# Altium PCB park-contor-12i.PcbDoc
Units mm, origin at the board's own origin, x right, y up, seen from the top; angles counter-clockwise.
Board outline 150 x 220.09 mm, 2 copper layers (Top Layer, Bottom Layer); 79 components, 105 nets, 463 pads, 2 vias.
Unrouted connection lines stored in the file: 143.
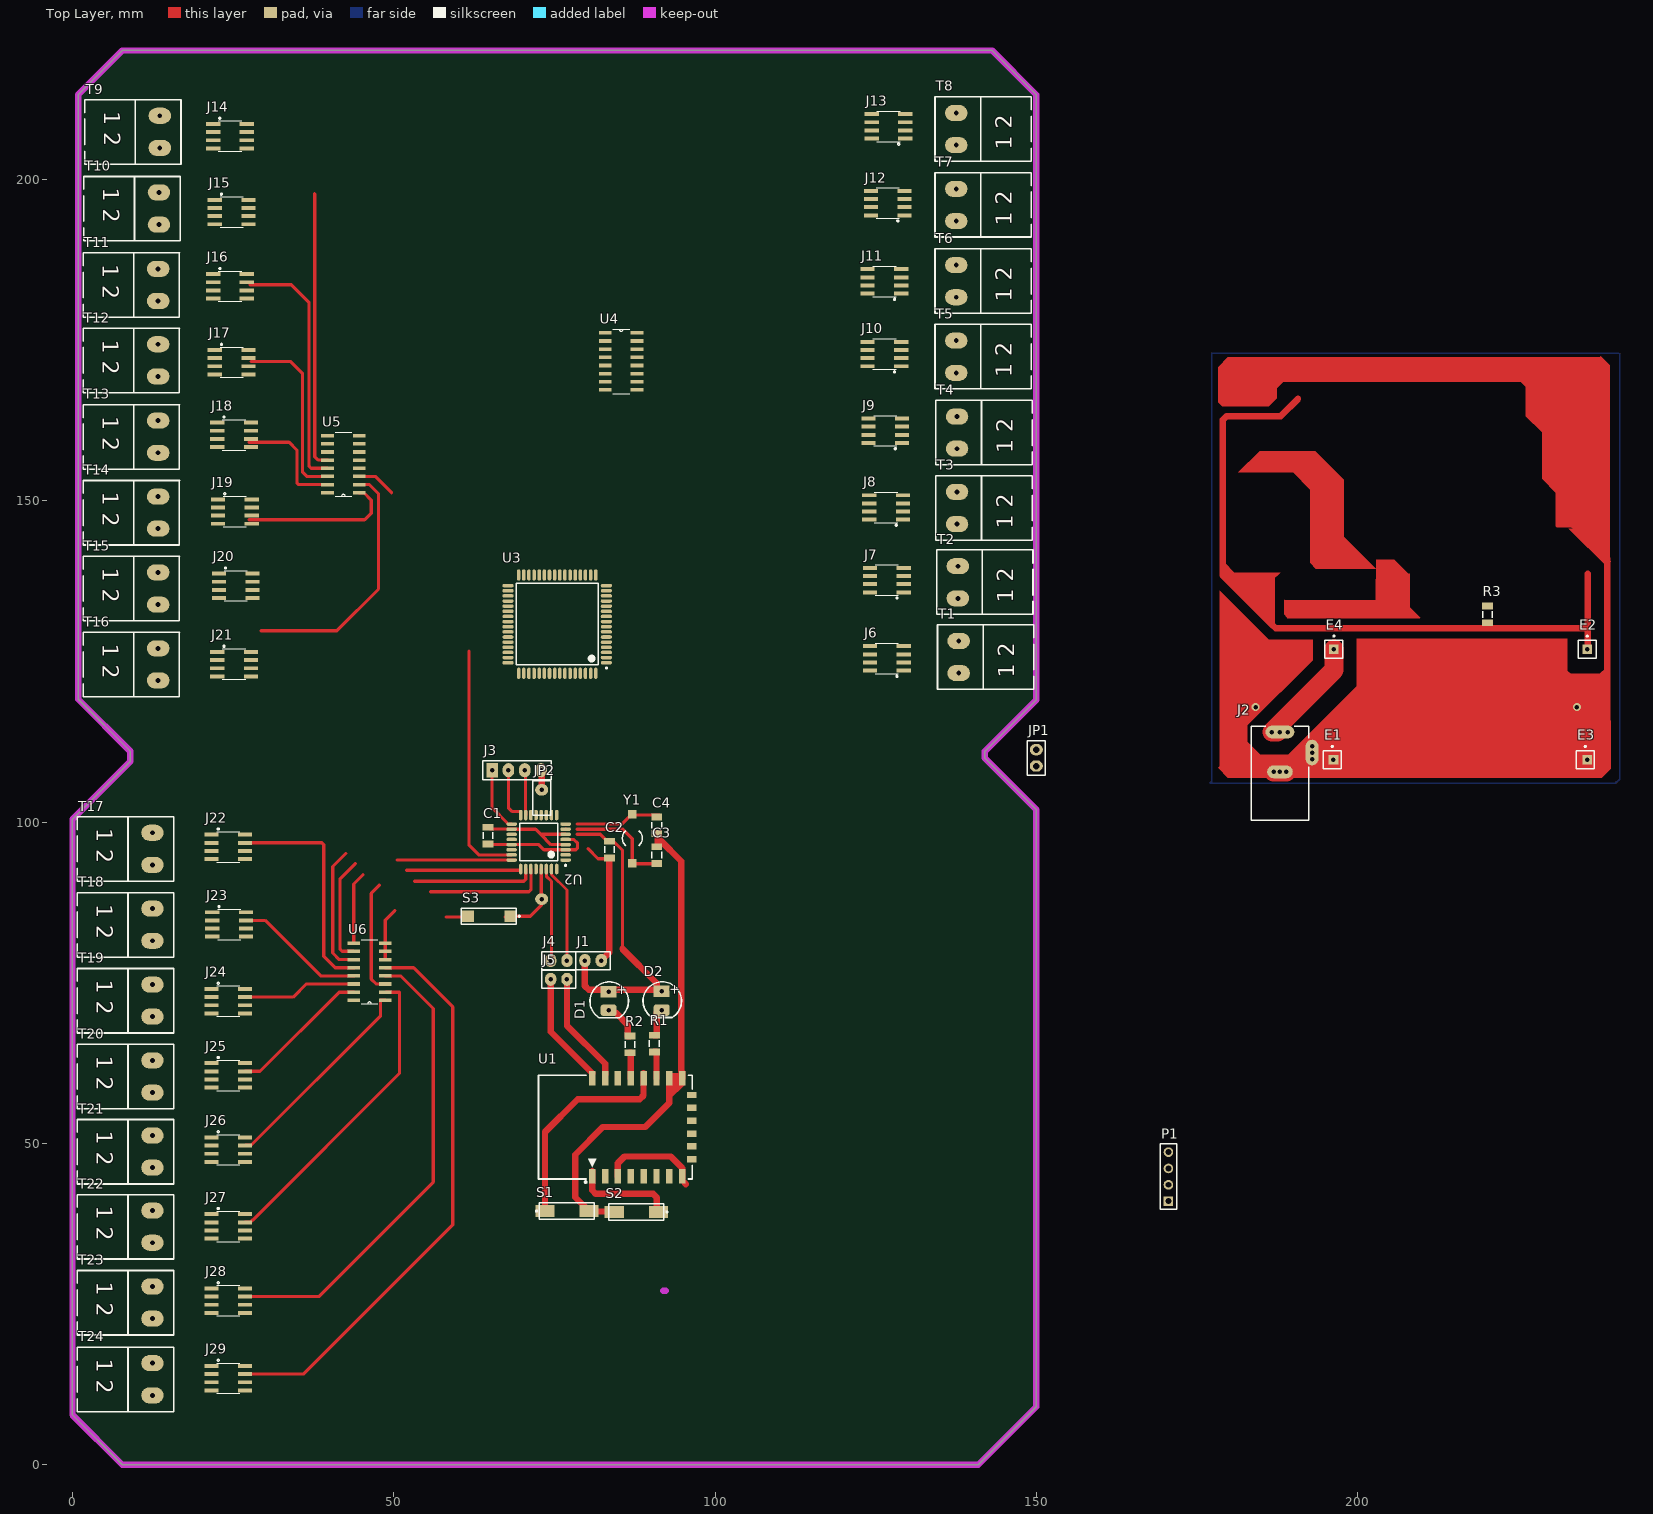
[diagram p0: Top Layer view]
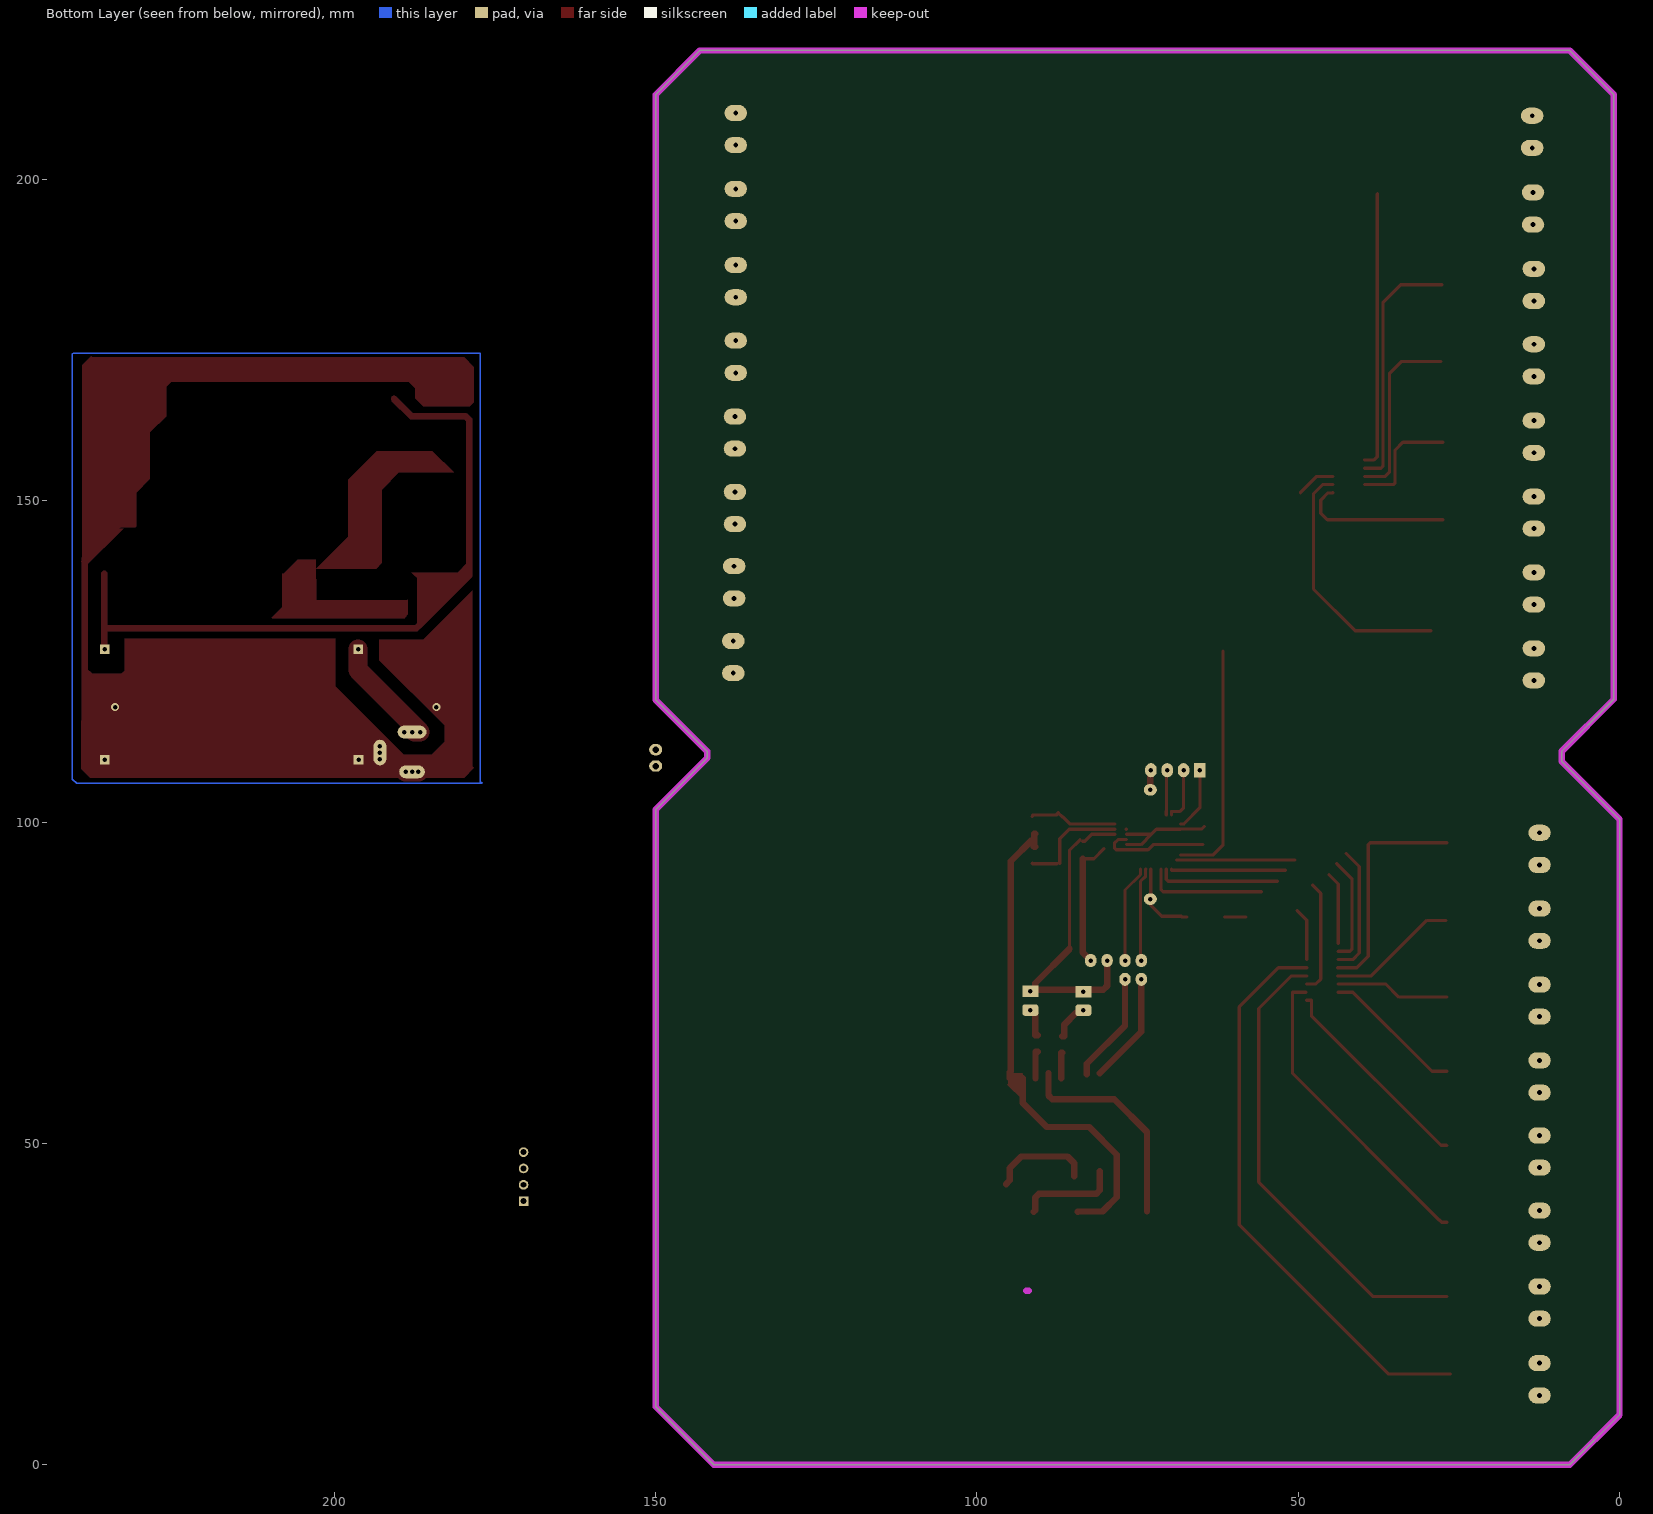
[diagram p1: Bottom Layer view, seen from below]

## Layer stack, top to bottom
Top Solder: solder mask 0.0102, Solder Resist, Dk 3.5
Top Layer: signal copper 0.0356
Dielectric 1: dielectric 0.32, FR-4, Dk 4.8
Bottom Layer: signal copper 0.0356
Bottom Solder: solder mask 0.0102, Solder Resist, Dk 3.5

## Board outline
0,7.747 7.747,0 140.97,0 150,9.03 150,101.968 141.986,109.982 141.986,110.998 150,119.012 150,213.22 143.129,220.091 7.747,220.091 0.889,213.233 0.889,119.126 9.017,110.998 9.017,109.474 0,100.457

## Design rules (kind name [scope] priority, off if disabled: settings)
Clearance Clearance_1 [InPolygon] p1: gap=0.8 ignorepadtopadclearanceinfootprint=FALSE
Clearance [All] p2: gap=0.254 ignorepadtopadclearanceinfootprint=FALSE except(0: Arc-Hole Track-Hole SMDPad-Hole THPad-Hole Via-Hole Fill-Hole Poly-Hole Region-Hole Text-Hole)
DiffPairsRouting [All] p1: maxlimit=0.254 minlimit=0.8 mostfreqgap=0.254 toplayer_minwidth=0.381 toplayer_maxwidth=0.381 toplayer_prefwidth=0.381 bottomlayer_minwidth=0.381 bottomlayer_maxwidth=0.381 bottomlayer_prefwidth=0.381 maxuncoupledlength=12.7
PolygonConnect [All] p1: connectstyle=Relief reliefconductorwidth=0.254 reliefentries=4 polygonreliefangle="90 Angle" airgapwidth=0.254
RoomDefinition park-contor-12i [InComponentClass('park-contor-12i')] p1: confinementstyle=ConfineIn formatcopy=TRUE lockcomponents=FALSE outline 151.638,0.762 536.575,0.762 536.575,58.547 151.638,58.547
RoutingLayers [All] p1: top layer_v5=FALSE bottom layer_v5=TRUE
RoutingVias [All] p1: holewidth=0.711 width=2.5 viastyle="Through Hole" minholewidth=0.711 minwidth=1.27 maxholewidth=0.711 maxwidth=2
SolderMaskExpansion [All] p1: expansion=0.102 istentingtop=FALSE
Width [All] p1: maxlimit=3 minlimit=0.5 preferedwidth=1
28 further rules are at their usual default settings.

## Components (designator, comment, footprint, x,y, rotation, side; value= is the part's Value field where it differs from the comment)
C1 "=Value" "CAP 1206" 64.643,97.917 r270 top
C2 "=Value" "CAP 1206" 83.566,95.758 r270 top
C3 "=Value" "CAP 1206" 90.932,94.842 r90 top
C4 "=Value" "CAP 1206" 90.932,99.541 r270 top
D1 "LED 5mm" LED-1 83.439,72.236 r0 top
D2 "LED 5mm" LED-1 91.694,72.263 r0 top
E1 "Antenna" PIN1#1 196.061,109.728 r0 top
E2 "Antenna" PIN1#2 235.747,126.894 r0 top
E3 "Antenna" PIN1#3 235.431,109.728 r0 top
E4 "Antenna" PIN1#2 196.315,126.894 r0 top
J1 "Header2X1" "Header 2X1"#1 81.026,78.459 r0 top
J2 "PWR2.5" KLD-0202 187.917,100.323 r90 top
J3 "Header4X1" "HEADER 4X1" 65.305,108.077 r0 top
J4 "Header2X1" "Header 2X1"#1 75.692,78.459 r180 top
J5 "Header2X1" "Header 2X1"#1 75.692,75.538 r0 top
J6 "ACS712" SO08 126.746,125.476 r90 top
J7 "ACS712" SO08 126.746,137.668 r90 top
J8 "ACS712" SO08 126.619,148.971 r90 top
J9 "ACS712" SO08 126.492,160.909 r90 top
J10 "ACS712" SO08 126.365,172.847 r90 top
J11 "ACS712" SO08 126.365,184.15 r90 top
J12 "ACS712" SO08 126.873,196.342 r90 top
J13 "ACS712" SO08 127,208.28 r90 top
J14 "ACS712" SO08 24.511,206.756 r270 top
J15 "ACS712" SO08 24.765,194.945 r270 top
J16 "ACS712" SO08 24.511,183.388 r270 top
J17 "ACS712" SO08 24.765,171.577 r270 top
J18 "ACS712" SO08 25.146,160.274 r270 top
J19 "ACS712" SO08 25.273,148.336 r270 top
J20 "ACS712" SO08 25.4,136.779 r270 top
J21 "ACS712" SO08 25.146,124.587 r270 top
J22 "ACS712" SO08 24.257,96.139 r270 top
J23 "ACS712" SO08 24.384,84.074 r270 top
J24 "ACS712" SO08 24.257,72.136 r270 top
J25 "ACS712" SO08 24.257,60.579 r270 top
J26 "ACS712" SO08 24.257,49.022 r270 top
J27 "ACS712" SO08 24.257,37.084 r270 top
J28 "ACS712" SO08 24.257,25.527 r270 top
J29 "ACS712" SO08 24.257,13.462 r270 top
JP1 "Jumper" "Header 2X1"#2 150,110 r90 top
JP2 "Jumper" "Header 2X1"#3 73.025,103.759 r270 top
P1 "Header 4" HDR1X4 170.561,41.021 r90 top
R1 "10K" "RES 1206 (3216X08L)" 90.551,65.532 r90 top
R2 "10K" "RES 1206 (3216X08L)" 86.741,65.409 r90 top
R3 "10K" "RES 1206 (3216X08L)" 220.191,132.334 r270 top
S1 "SW-PB" SPST-2#1 76.962,39.47 r0 top
S2 "SW-PB" SPST-2#1 87.757,39.343 r180 top
S3 "SW-PB" SPST-2#2 64.77,85.344 r180 top
T1 "Phoenix terminal" "phoenix terminal 2" 149.606,120.697 r90 top
T2 "Phoenix terminal" "phoenix terminal 2" 149.479,132.334 r90 top
T3 "Phoenix terminal" "phoenix terminal 2" 149.352,143.891 r90 top
T4 "Phoenix terminal" "phoenix terminal 2" 149.352,155.622 r90 top
T5 "Phoenix terminal" "phoenix terminal 2" 149.225,167.433 r90 top
T6 "Phoenix terminal" "phoenix terminal 2" 149.225,179.197 r90 top
T7 "Phoenix terminal" "phoenix terminal 2" 149.225,191.055 r90 top
T8 "Phoenix terminal" "phoenix terminal 2" 149.225,202.866 r90 top
T9 "Phoenix terminal" "phoenix terminal 2" 1.905,212.424 r270 top
T10 "Phoenix terminal" "phoenix terminal 2" 1.778,200.486 r270 top
T11 "Phoenix terminal" "phoenix terminal 2" 1.651,188.595 r270 top
T12 "Phoenix terminal" "phoenix terminal 2" 1.651,176.864 r270 top
T13 "Phoenix terminal" "phoenix terminal 2" 1.651,164.973 r270 top
T14 "Phoenix terminal" "phoenix terminal 2" 1.651,153.162 r270 top
T15 "Phoenix terminal" "phoenix terminal 2" 1.651,141.351 r270 top
T16 "Phoenix terminal" "phoenix terminal 2" 1.651,129.54 r270 top
T17 "Phoenix terminal" "phoenix terminal 2" 0.762,100.838 r270 top
T18 "Phoenix terminal" "phoenix terminal 2" 0.762,89.027 r270 top
T19 "Phoenix terminal" "phoenix terminal 2" 0.762,77.216 r270 top
T20 "Phoenix terminal" "phoenix terminal 2" 0.762,65.405 r270 top
T21 "Phoenix terminal" "phoenix terminal 2" 0.762,53.721 r270 top
T22 "Phoenix terminal" "phoenix terminal 2" 0.762,42.037 r270 top
T23 "Phoenix terminal" "phoenix terminal 2" 0.762,30.226 r270 top
T24 "Phoenix terminal" "phoenix terminal 2" 0.762,18.288 r270 top
U1 "ESP_12_E" ESP_12_E 80.893,44.535 r90 top
U2 "ATmega8-16AC" 32A_N 72.544,96.901 r180 top
U3 "ATmega64-16AC" 64A_N 75.438,130.81 r180 top
U4 "CD4051BCM" SOIC127P600X175-16N 85.395,171.704 r0 top
U5 "CD4051BCM" SOIC127P600X175-16N 42.164,155.702 r180 top
U6 "CD4051BCM" SOIC127P600X175-16N 46.228,76.708 r180 top
Y1 "XTAL" R38 87.122,97.509 r0 top

## Footprints (in the part's own frame and the unit in brackets; to place one, negate y for a bottom-side part, rotate by r counter-clockwise, add the part's x,y. Pads: shape width x height; smd on the part's side, far side on the other; paste and mask are expansions set on the pad)
32A_N [mm] "Thin QFP, 32-Leads, Body 7x7mm, Pitch 0.8mm, IPC Medium Density"
  oval 1.65x0.55 smd: 1(-4.2,2.8) 2(-4.2,2) 3(-4.2,1.2) 4(-4.2,0.4) 5(-4.2,-0.4) 6(-4.2,-1.2) 7(-4.2,-2) 8(-4.2,-2.8) 17(4.2,-2.8) 18(4.2,-2) 19(4.2,-1.2) 20(4.2,-0.4) 21(4.2,0.4) 22(4.2,1.2) 23(4.2,2) 24(4.2,2.8)
  oval 0.55x1.65 smd: 9(-2.8,-4.2) 10(-2,-4.2) 11(-1.2,-4.2) 12(-0.4,-4.2) 13(0.4,-4.2) 14(1.2,-4.2) 15(2,-4.2) 16(2.8,-4.2) 25(2.8,4.2) 26(2,4.2) 27(1.2,4.2) 28(0.4,4.2) 29(-0.4,4.2) 30(-1.2,4.2) 31(-2,4.2) 32(-2.8,4.2)
  silkscreen extent -4.33,-2.95 2.95,3.75, body extent -3.5,-3.5 3.5,3.5, height 1.2
64A_N [mm] "Thin QFP, 64-Leads, Body 14x14mm, Pitch 0.8mm, IPC Medium Density"
  oval 1.75x0.55 smd: 1(-7.65,6) 2(-7.65,5.2) 3(-7.65,4.4) 4(-7.65,3.6) 5(-7.65,2.8) 6(-7.65,2) 7(-7.65,1.2) 8(-7.65,0.4) 9(-7.65,-0.4) 10(-7.65,-1.2) 11(-7.65,-2) 12(-7.65,-2.8) 13(-7.65,-3.6) 14(-7.65,-4.4) 15(-7.65,-5.2) 16(-7.65,-6) 33(7.65,-6) 34(7.65,-5.2) 35(7.65,-4.4) 36(7.65,-3.6) 37(7.65,-2.8) 38(7.65,-2) 39(7.65,-1.2) 40(7.65,-0.4) 41(7.65,0.4) 42(7.65,1.2) 43(7.65,2) 44(7.65,2.8) 45(7.65,3.6) 46(7.65,4.4) 47(7.65,5.2) 48(7.65,6)
  oval 0.55x1.75 smd: 17(-6,-7.65) 18(-5.2,-7.65) 19(-4.4,-7.65) 20(-3.6,-7.65) 21(-2.8,-7.65) 22(-2,-7.65) 23(-1.2,-7.65) 24(-0.4,-7.65) 25(0.4,-7.65) 26(1.2,-7.65) 27(2,-7.65) 28(2.8,-7.65) 29(3.6,-7.65) 30(4.4,-7.65) 31(5.2,-7.65) 32(6,-7.65) 49(6,7.65) 50(5.2,7.65) 51(4.4,7.65) 52(3.6,7.65) 53(2.8,7.65) 54(2,7.65) 55(1.2,7.65) 56(0.4,7.65) 57(-0.4,7.65) 58(-1.2,7.65) 59(-2,7.65) 60(-2.8,7.65) 61(-3.6,7.65) 62(-4.4,7.65) 63(-5.2,7.65) 64(-6,7.65)
  silkscreen extent -7.78,-6.35 6.35,6.95, body extent -7,-7 7,7, height 1.2
"CAP 1206" [mm]
  rect 1.05x1.7 smd: 1(-1.27,0) 2(1.326,0)
  silkscreen extent -0.47,-0.75 0.53,0.75, body extent -1.49,-0.77 1.55,0.75, height 0.75
ESP_12_E [mm] "ESP-12 Wi-Fi Module by AI-Thinker"
  rect 2.25x1 smd: 1(0.375,0) 2(0.375,-2) 3(0.375,-4) 4(0.375,-6) 5(0.375,-8) 6(0.375,-10) 7(0.375,-12) 8(0.375,-14) 15(15.625,-14) 16(15.625,-12) 17(15.625,-10) 18(15.625,-8) 19(15.625,-6) 20(15.625,-4) 21(15.625,-2) 22(15.625,0)
  rect 1x1.5 smd: 9(3,-15.5) 10(5,-15.5) 11(7,-15.5) 12(9,-15.5) 13(11,-15.5) 14(13,-15.5)
  silkscreen extent -0.7,-15.57 16.08,8.37, body extent 0,-15.49 16,8.51, height 2.75
HDR1X4 [mm] "Connector; Header; 4 Position"
  rect 1.5x1.5 hole 0.9: 1(0,0)
  round 1.5 hole 0.9: 2(2.54,0) 3(5.08,0) 4(7.62,0)
  silkscreen extent -1.27,-1.27 8.89,1.27
"Header 2X1"#1 [mil]
  oval 70x80 hole 27.56: 1(-50,0) 2(50,0)
  silkscreen extent -105,-55 105,55, body extent -100,-50 100,50, height 374
"Header 2X1"#2 [mil]
  oval 70x80 hole 40: 1(-50,0) 2(50,0)
  silkscreen extent -105,-55 105,55, body extent -100,-50 100,50, height 374
"Header 2X1"#3 [mil]
  oval 70x80 hole 27.56: 1(-50,0) 2(620,0)
  silkscreen extent -105,-55 105,55, body extent -100,-50 100,50, height 374
"HEADER 4X1" [mm]
  rect 1.8x2.2 hole 0.7: 1(0,0)
  oval 1.8x2.2 hole 0.7: 2(2.54,0) 3(5.08,0) 4(7.62,0)
  silkscreen extent -1.43,-1.5 9.18,1.5, body extent -1.19,-1.22 8.97,1.32, height 8.38
KLD-0202 [mm] "DC Power Jack, 2.5mm, KLD Series, PCB Mount"
  oval 2x4.5 hole 0.7: 1(13.7,0)
  round 1.5 hole 0.7: 1A(13.7,-1.25) 1B(13.7,1.25) 2A(7.5,-1) 2B(7.5,1) 3A(9.5,-5) 3B(11.5,-5)
  oval 2x4 hole 0.7: 2(7.5,0)
  oval 4x2 hole 0.7: 3(10.5,-5)
  silkscreen extent 0,-4.5 14.6,4.5
LED-1 [mm] "LED; 2 Leads"
  rect 2.5x1.8 hole 0.7: 1(0,1.397)
  rrect50% 2.5x1.8 hole 0.7: 2(0,-1.524)
  silkscreen extent -2.91,-2.67 3.09,2.9
"phoenix terminal 2" [mil] "2 terminals"
  oval 98.43x137.8 hole 30: 1(98.15,460) 2(295,460)
  silkscreen extent 0,0 395,591
PIN1#1 [mm] "Generic Antenna; 1 Lead"
  rect 1.5x1.5 hole 0.7: 1(0.186,0)
  silkscreen extent -1.4,-1.4 1.4,2.17
PIN1#2 [mm] "Generic Antenna; 1 Lead"
  rect 1.5x1.5 hole 0.7: 1(0,0)
  silkscreen extent -1.4,-1.4 1.4,2.17
PIN1#3 [mm] "Generic Antenna; 1 Lead"
  rect 1.5x1.5 hole 0.7: 1(0.316,0)
  silkscreen extent -1.4,-1.4 1.4,2.17
R38 [mm] "Crystal, Thru-Hole; 2 Leads; Body 3.1 x 8.2 mm (Dia.xH)"
  rect 1.3x1.3 smd: 1(0,3.709) 2(0,-3.911)
  silkscreen extent -1.55,-1.19 1.55,1.17
"RES 1206 (3216X08L)" [mm] "Chip Resistor, 2-Leads, Body 3.2x1.6mm, IPC High Density _ (0.125 W)"
  rect 1.05x1.7 smd: 1(-1.295,0) 2(1.301,0)
  silkscreen extent -0.5,-0.75 0.5,0.75, body extent -1.52,-0.76 1.53,0.76, height 0.6
SO08 [mil]
  rect 24x87 smd: 1(-75,-103) 2(-25,-103) 3(25,-103) 4(75,-103) 5(75,103) 6(25,103) 7(-25,103) 8(-75,103)
  silkscreen extent -115,-71 93,71
SOIC127P600X175-16N [mil]
  rect 78x22 smd: 1(-97,175) 2(-97,125) 3(-97,75) 4(-97,25) 5(-97,-25) 6(-97,-75) 7(-97,-125) 8(-97,-175) 9(97,-175) 10(97,-125) 11(97,-75) 12(97,-25) 13(97,25) 14(97,75) 15(97,125) 16(97,175)
  silkscreen extent -51,-197 51,197
SPST-2#1 [mm] "Switch; 2 Leads"
  rect 3x1.85 smd: 1(-3.429,0) 2(3.429,0)
  silkscreen extent -4.89,-1.27 4.28,1.27
SPST-2#2 [mm] "Switch; 2 Leads"
  rect 2x1.85 smd: 1(-3.429,0) 2(3.302,0)
  silkscreen extent -4.89,-1.27 4.28,1.27

## Part data
C1 C2 C3 C4: library part Capacitor, "Capacitor"
D1 D2: "Typical LED", Designer="Seyed Mohsen Ghasemian", PackageDescription="LED; 2 Leads", PackageReference=LED, Published=07/31/2012, Publisher=www.picpars.com
E1 E2 E3 E4: "Generic Antenna", LatestRevisionDate=17-Jul-2002, LatestRevisionNote="Re-released for DXP Platform.", PackageReference=PIN1, Published=24-Mar-1999, Publisher="Altium Limited"
J2: "Low Voltage Power Supply Connector", ComponentLink1Description="Manufacturer Link", ComponentLink1URL=http://domino.kycon.com/internet/Products.html, DatasheetDocument=09-May-2002, Published=17-Dec-2003, Publisher="Altium Limited"
J6 J7 J8 J9 J10 J11 J12 J13 J14 J15 J16 J17 J18 J19 J20 J21 J22 J23 J24 J25 J26 J27 J28 J29: "Current Sensor 5A 1 Channel Hall Effect, Open Loop Bidirectional 8-SOIC (0.154, 3.90mm Width)", Package=None, Availability="In Stock", Check_prices=https://www.snapeda.com/parts/ACS712/Allegro+MicroSystems+LLC/view-part/?ref=eda, MF="Allegro MicroSystems", MP=ACS712, Price=None, SnapEDA_Link=https://www.snapeda.com/parts/ACS712/Allegro+MicroSystems+LLC/view-part/?ref=snap
P1: "Header, 4-Pin", LatestRevisionDate=17-Jul-2002, LatestRevisionNote="Re-released for DXP Platform.", Publisher="Altium Limited"
R1 R2 R3: library part Resistor, "Resistor", Power="1/4 W", Tolerance=5%
S1 S2 S3: "Switch", LatestRevisionDate=17-Jul-2002, LatestRevisionNote="Re-released for DXP Platform.", PackageDescription="Switch; 2 Leads", PackageReference=SPST-2, Published=24-Mar-1999, Publisher="Altium Limited"
T1 T2 T3 T4 T5 T6 T7 T8 T9 T10 T11 T12 T13 T14 T15 T16 T17 T18 T19 T20 T21 T22 T23 T24: library part "Phoenix terminal 2", "Terminal 2 Pin", ComponentLinkURL=www.picpars.com, Designer="Seyed Mohsen Ghasemain", E-mail=picpars@gmail.com
U1: "ESP-12 Wi-Fi Module by AI-Thinker", IC=ESP8266-EX, Vendor=Ai-thinker
U2: "8-Bit AVR Microcontroller with 8K Bytes of In-System Programmable Flash Memory", Supplier Part Number 1=ATMEGA8-16AC-ND, Code_JEDEC=MS-026-ABA, ComponentLink1Description=Datasheet, ComponentLink1URL=http://www.atmel.com/dyn/resources/prod_documents/doc2486.pdf, ComponentLink2Description="Atmel.com Home", ComponentLink2URL=http://www.atmel.com, DatasheetVersion=2486H-AVR-09/02, LatestRevisionDate=16-Oct-2006, LatestRevisionNote="IPC-7351 Footprint Added.", PackageDescription="32-Lead, 7x7x1.0 mm Body, 0.8mm Lead Pitch, Thin Profile Plastic Quad Flat Package (TQFP)", PackageReference=32A, PackageVersion="revB, Oct-2001", Published=17-Sep-2003, Publisher="Altium Limited", Supplier 1=Digi-Key, Supplier 2=Mouser, Supplier Part Number 2=556-ATMEGA8-16AC
U3: "8-Bit AVR Microcontroller with 64K Bytes of In-System Programmable Flash Memory", Supplier Part Number 1=ATMEGA64-16AC-ND, Code_JEDEC=MS-026-AEB, ComponentLink1Description=Datasheet, ComponentLink1URL=http://www.atmel.com/dyn/resources/prod_documents/doc2490.pdf, ComponentLink2Description="Atmel.com Home", ComponentLink2URL=http://www.atmel.com, DatasheetVersion=2490C-AVR-009/02, LatestRevisionDate=16-Oct-2006, LatestRevisionNote="IPC-7351 Footprint Added.", PackageDescription="64-Pin Plastic Thin Profile Quad Flat Pack, 14 x 14 x 1.0 mm Body, 0.8 mm Pitch (TQFP)", PackageReference=64A, PackageVersion="revB, Oct-2001", Published=17-Sep-2003, Publisher="Altium Limited", Supplier 1=Digi-Key, Supplier 2=Mouser, Supplier Part Number 2=556-ATMEGA64-16AC
U4 U5 U6: "1 Circuit IC Switch 8:1 240Ohm 16-SOIC", Package="SOIC-16 Rochester Electronics", Availability=Unavailable, MF="ON Semiconductor", MP=CD4051BCM, Price=None, SnapEDA_Link=https://www.snapeda.com/parts/CD4051BCM/ON%20Semiconductor/view-part/2774140/?ref=snap
Y1: "Crystal Oscillator", LatestRevisionDate=17-Jul-2002, LatestRevisionNote="Re-released for DXP Platform.", PackageDescription="Crystal, Thru-Hole; 2 Leads; Body 3.1 x 8.2 mm (Dia.xH)", PackageReference=R38, Published=8-Jun-2000, Publisher="Altium Limited"

## Via types
v1: diameter 1.27, hole 0.711, Top Layer to Bottom Layer, 2 vias

## Nets (pads, with @x,y where several pads share a name; then routed paths per layer and width w, separated by ;. In a path a pad name is that pad's centre, name@x,y a point inside that pad or via, vN(x,y) a via of type N, cw(c..) or ccw(c..) an arc to the next point about the centre after c; other vN are vias at no path point)
A1: J18.7 U5.12 | length 43.2
  Top Layer w0.5: 37.665,197.793 37.719,197.739 37.719,156.845 38.198,156.366 39.671,156.366 U5.12
A2: J6.7 J19.7 U5.13 | length 38.8
  Top Layer w0.5: 27.635,183.642 34.036,183.642 36.83,180.848 36.83,155.36 37.123,155.067 U5.13
A3: J7.7 J20.7 U5.14 | length 28.4
  Top Layer w0.5: 27.762,171.704 33.909,171.704 35.814,169.799 35.814,154.432 36.449,153.797 U5.14
A4: J8.7 J21.7 U5.15 | length 17.9
  Top Layer w0.5: 27.508,159.131 33.707,159.131 34.925,157.913 34.925,152.82 35.218,152.527 U5.15
A5: J9.7 U5.1 | length 23.8
  Top Layer w0.5: 27.508,147.066 45.466,147.066 46.482,148.082 46.482,150.114 45.368,151.228 44.657,151.228 U5.1
A6: J10.7 U5.2 | length 39.4
  Top Layer w0.5: 29.381,129.794 41.148,129.794 47.625,136.271 47.625,151.13 46.228,152.527 U5.2
A7: J11.7 U4.12
A8: J12.7 U4.13
A9: J13.7 U4.14
A10: J14.7 U4.15
A11: J15.7 U4.1
A12: J16.7 U4.2
A13: J17.7
A17: J22.7 U6.12 | length 35.2
  Top Layer w0.5: J22.7 38.823,96.774 39.116,96.481 39.116,79.121 40.894,77.343 U6.12@43.891,77.343
A18: J23.7 U6.13 | length 20.5
  Top Layer w0.5: J23.7 29.972,84.709 38.608,76.073 U6.13@43.891,76.073
A19: J24.7 U6.14 | length 17.7
  Top Layer w0.5: J24.7 34.332,72.771 36.364,74.803 U6.14
A20: J25.7 U6.15 | length 22
  Top Layer w0.5: J25.7 29.189,61.214 41.508,73.533 U6.15
A21: J26.7 U6.1 | length 32.6
  Top Layer w0.5: J26.7 26.928,49.712 27.78,49.712 47.951,69.883 47.951,72.234 47.981,72.263 U6.1
A22: J27.7 U6.2 | length 48.3
  Top Layer w0.5: J27.7 27.673,37.719 28.082,38.127 28.134,38.127 50.888,60.881 50.888,73.533 U6.2@48.819,73.533
A23: J28.7 U6.4 | length 73.2
  Top Layer w0.5: J28.7 38.315,26.162 56.134,43.981 56.134,70.993 51.054,76.073 U6.4
A24: J29.7 U6.5 | length 89.4
  Top Layer w0.5: J29.7@26.337,14.097 J29.7 35.941,14.097 59.182,37.338 59.182,71.247 53.086,77.343 U6.5
ADC: U1.2
btn: S1.1 U1.18 | length 33.5
  Top Layer w1: S1.1 73.533,51.789 78.613,56.869 88.282,56.869 88.868,57.455 U1.18@88.868,60.933
ca1: U2.24 U4.11 U6.11 | length 38.4
  Top Layer w0.5: 42.539,95.117 40.513,93.091 40.513,79.629 41.529,78.613 U6.11 ; 50.54,94.101 U2.24 U2.24@68.961,94.101
ca2: U5.11
cb1: U2.25 U4.10 U6.10 | length 34.4
  Top Layer w0.5: U6.10 43.735,79.912 41.949,79.912 41.656,80.205 41.656,91.186 44.012,93.542 ; 52.013,92.526 69.721,92.526 69.744,92.549 U2.25
cb2: U5.10
cc1: U2.26 U4.9 U6.9 | length 30.3
  Top Layer w0.5: U6.9 43.764,90.373 45.212,91.821 ; 53.213,90.805 70.251,90.805 70.544,91.098 U2.26
cc2: U5.9
GND: C1.2 C2.2 C3.2 C4.2 E1.1 E3.1 J1.2 J2.2 J2.2A J2.2B J2.3 J2.3A J2.3B S1.2 S2.2 S3.2 U1.15 U1.16 U2.3 U2.5 U2.21 U4.6 U4.7 U4.8 U5.6 U5.7 U5.8 U6.6 U6.7 U6.8 | length 218.3
  Top Layer w0.5: U6.6 U6.7 U6.8 48.692,84.76 50.165,86.233 ; 58.166,85.217 S3.2@61.468,85.217 ; C1.2@64.834,96.501 U2.21 72.563,96.501 73.363,95.701 U2.3 78.311,95.701 78.598,95.988 78.465,95.847 78.612,95.994 78.612,96.725 78.036,97.301 U2.5 ; 80.243,95.847 81.787,94.304 C2.2@83.566,94.304 ; C3.2@91.44,96.041 91.44,97.22
  Top Layer w1: J1.2 83.566,79.729 C2.2@83.566,94.304 ; S2.2 84.264,39.406 80.454,39.406 S1.2 78.232,41.629 78.232,48.233 82.55,52.551 89.154,52.551 92.893,56.29 U1.16 U1.15 94.893,61.078 94.742,61.229 94.742,93.918 91.44,97.22 ; C3.2 91.034,96.168 91.059,96.193 91.059,98.19 91.034,98.215 C4.2 ; 233.978,145.852 238.86,140.97 238.86,112.841 E3.1
  Top Layer w3: J2.2B J2.2 J2.2A 190.917,109.823 J2.3A E1.1@196.728,109.823 ; E1.1 E3.1
  other v1: 184.123,117.894 234.123,117.894
i1: U2.27 U4.3 U6.3 | length 36.6
  Top Layer w0.5: 47.752,90.17 46.482,88.9 46.482,75.565 47.244,74.803 U6.3 ; 55.753,89.154 71.051,89.154 71.344,89.447 U2.27
i2: U2.23 U5.3 | length 43.5
  Top Layer w0.5: U5.3 47.117,153.797 49.657,151.257 ; 61.722,126.619 61.722,96.393 63.214,94.901 U2.23
i9: U1.7
i11: U1.5
i12: U1.4
i13: U1.6
led: R1.1 U1.17 | length 4.4
  Top Layer w1: R1.1 90.868,64.237 90.893,64.212 U1.17
NetC3_1: C3.1 U2.7 Y1.2 | length 17
  Top Layer w0.5: U2.7 U2.7@76.754,98.891 ; 78.532,98.891 85.64,98.891 87.122,97.409 Y1.2 ; Y1.2@87.503,93.572 87.566,93.508 C3.1@91.376,93.508 ; C3.1@91.376,93.635 C3.1@91.44,93.572
NetC4_1: C4.1 U2.8 Y1.1 | length 14
  Top Layer w0.5: 78.522,99.701 85.513,99.701 86.63,100.818 86.722,100.818 87.317,101.413 87.317,101.505 Y1.1@87.566,101.255 ; Y1.1@87.503,101.192 87.602,101.093 C4.1@91.341,101.093 ; C4.1@91.341,100.966 C4.1@91.44,100.867
NetD1_2: D1.2 R2.2 | length 5.5
  Top Layer w1: D1.2@84.189,70.712 84.189,70.312 84.589,70.312 86.391,68.51 86.391,66.734 86.416,66.709 R2.2
NetD2_2: D2.2 R1.2 | length 4.8
  Top Layer w1: R1.2 90.876,66.833 90.901,66.858 90.901,69.753 90.944,69.796 90.944,70.339 91.344,70.739 D2.2
NetJ3_1: J3.1 U2.17 | length 9.9
  Top Layer w0.5: J3.1 65.305,102.235 67.784,99.756 67.784,99.724 67.808,99.701 U2.17
NetJ3_2: J3.2 U2.16 | length 8.5
  Top Layer w0.5: J3.2 67.845,102.208 68.392,101.661 69.721,101.661 69.744,101.637 U2.16
NetJ3_3: J3.3 U2.15 | length 7
  Top Layer w0.5: J3.3 70.523,107.939 70.523,101.716 70.534,101.705 70.534,101.111 U2.15
NetJ4_1: J4.1 U2.31 | length 15.2
  Top Layer w0.5: U2.31 74.554,92.691 74.554,91.84 76.962,89.431 J4.1
NetJ4_2: J4.2 U2.30 | length 14.6
  Top Layer w0.5: U2.30 73.754,92.691 73.754,92.106 73.765,92.095 73.765,91.562 74.549,90.778 74.549,78.586 J4.2
NetJ5_1: J5.1 U1.22 | length 17.3
  Top Layer w1: J5.1 74.422,67.379 U1.22@80.868,60.933
NetJ5_2: J5.2 U1.21 | length 16.2
  Top Layer w1: 76.962,74.522 76.962,68.326 82.893,62.395 U1.21@82.893,60.785
NetJ6_1: J6.1 J6.2 T1.1
NetJ6_3: J6.3 J6.4 T1.2
NetJ7_1: J7.1 J7.2 T2.1
NetJ7_3: J7.3 J7.4 T2.2
NetJ8_1: J8.1 J8.2 T3.1
NetJ8_3: J8.3 J8.4 T3.2
NetJ9_1: J9.1 J9.2 T4.1
NetJ9_3: J9.3 J9.4 T4.2
NetJ10_1: J10.1 J10.2 T5.1
NetJ10_3: J10.3 J10.4 T5.2
NetJ11_1: J11.1 J11.2 T6.1
NetJ11_3: J11.3 J11.4 T6.2
NetJ12_1: J12.1 J12.2 T7.1
NetJ12_3: J12.3 J12.4 T7.2
NetJ13_1: J13.1 J13.2 T8.1
NetJ13_3: J13.3 J13.4 T8.2
NetJ14_1: J14.1 J14.2 T9.1
NetJ14_3: J14.3 J14.4 T9.2
NetJ15_1: J15.1 J15.2 T10.1
NetJ15_3: J15.3 J15.4 T10.2
NetJ16_1: J16.1 J16.2 T11.1
NetJ16_3: J16.3 J16.4 T11.2
NetJ17_1: J17.1 J17.2 T12.1
NetJ17_3: J17.3 J17.4 T12.2
NetJ18_1: J18.1 J18.2 T13.1
NetJ18_3: J18.3 J18.4 T13.2
NetJ19_1: J19.1 J19.2 T14.1
NetJ19_3: J19.3 J19.4 T14.2
NetJ20_1: J20.1 J20.2 T15.1
NetJ20_3: J20.3 J20.4 T15.2
NetJ21_1: J21.1 J21.2 T16.1
NetJ21_3: J21.3 J21.4 T16.2
NetJ22_1: J22.1 J22.2 T17.1
NetJ22_3: J22.3 J22.4 T17.2
NetJ23_1: J23.1 J23.2 T18.1
NetJ23_3: J23.3 J23.4 T18.2
NetJ24_1: J24.1 J24.2 T19.1
NetJ24_3: J24.3 J24.4 T19.2
NetJ25_1: J25.1 J25.2 T20.1
NetJ25_3: J25.3 J25.4 T20.2
NetJ26_1: J26.1 J26.2 T21.1
NetJ26_3: J26.3 J26.4 T21.2
NetJ27_1: J27.1 J27.2 T22.1
NetJ27_3: J27.3 J27.4 T22.2
NetJ28_1: J28.1 J28.2 T23.1
NetJ28_3: J28.3 J28.4 T23.2
NetJ29_1: J29.1 J29.2 T24.1
NetJ29_3: J29.3 J29.4 T24.2
NetR2_1: R2.1 U1.19 | length 4.1
  Top Layer w1: R2.1 86.868,64.113 86.893,64.088 U1.19
o8: P1.1
o9: P1.2
o10: P1.3
rst: J3.4 JP2.1 JP2.2 R3.1 S2.1 S3.1 U1.1 U2.29 | length 30.4
  Top Layer w0.5: S3.1@67.367,85.217 S3.1@68.147,85.217 ; S3.1 71.247,85.344 72.944,87.041 72.944,88.011 U2.29
  Top Layer w1: JP2.1@73.052,105.283 J3.4@73.052,107.95 ; U1.1@80.868,45.683 80.868,42.723 81.454,42.137 90.377,42.137 90.962,41.551 90.962,39.567 S2.1
rst2: P1.4
tx: JP1.1 JP1.2
vcc: E4.1 J2.1 J2.1A J2.1B | length 17.8
  Top Layer w3: J2.1@187.552,114.023 J2.1B 196.315,123.671 E4.1
vdd: C1.1 C2.1 D1.1 D2.1 E2.1 J1.1 R3.2 U1.3 U1.8 U2.4 U2.6 U2.18 U4.16 U5.16 U6.16 | length 198.3
  Top Layer w0.5: C1.1@64.643,99.314 65.024,98.933 67.46,98.933 67.471,98.922 67.738,98.922 67.749,98.911 68.334,98.911 U2.18 72.068,98.901 72.868,98.101 ; U2.4 76.734,96.511 74.458,96.511 72.868,98.101 ; U2.6 72.868,98.101 ; 78.522,98.101 82.168,98.101 83.241,97.028 C2.1 ; C2.1@83.947,97.282 85.598,95.631 85.598,80.264
  Top Layer w1: J1.1 79.756,74.5 80.342,73.914 83.439,73.914 91.948,73.914 91.09,73.914 90.944,74.06 90.944,74.918 85.598,80.264 ; U1.3 84.893,46.937 85.924,47.968 93.085,47.968 94.893,46.16 U1.8 ; U1.8@94.884,44.749 94.884,44.247 95.47,43.661 ; 186.663,137.829 186.663,130.761 ; 190.727,165.862 188.06,163.195 179.629,163.195 179.043,162.609 179.043,138.381 186.663,130.761 ; E2.1 235.812,126.959 235.812,130.175 ; 235.812,138.628 235.812,130.175 ; 186.663,130.761 187.249,130.175 235.812,130.175
pads on no net: J6.5 J6.6 J6.8 J7.5 J7.6 J7.8 J8.5 J8.6 J8.8 J9.5 J9.6 J9.8 J10.5 J10.6 J10.8 J11.5 J11.6 J11.8 J12.5 J12.6 J12.8 J13.5 J13.6 J13.8 J14.5 J14.6 J14.8 J15.5 J15.6 J15.8 J16.5 J16.6 J16.8 J17.5 J17.6 J17.8 J18.5 J18.6 J18.8 J19.5 J19.6 J19.8 J20.5 J20.6 J20.8 J21.5 J21.6 J21.8 J22.5 J22.6 J22.8 J23.5 J23.6 J23.8 J24.5 J24.6 J24.8 J25.5 J25.6 J25.8 J26.5 J26.6 J26.8 J27.5 J27.6 J27.8 J28.5 J28.6 J28.8 J29.5 J29.6 J29.8 U1.9 U1.10 U1.11 U1.12 U1.13 U1.14 U1.20 U2.1 U2.2 U2.9 U2.10 U2.11 U2.12 U2.13 U2.14 U2.19 U2.20 U2.22 U2.28 U2.32 U3.1 U3.2 U3.3 U3.4 U3.5 U3.6 U3.7 U3.8 U3.9 U3.10 U3.11 U3.12 U3.13 U3.14 U3.15 U3.16 U3.17 U3.18 U3.19 U3.20 U3.21 U3.22 U3.23 U3.24 U3.25 U3.26 U3.27 U3.28 U3.29 U3.30 U3.31 U3.32 U3.33 U3.34 U3.35 U3.36 U3.37 U3.38 U3.39 U3.40 U3.41 U3.42 U3.43 U3.44 U3.45 U3.46 U3.47 U3.48 U3.49 U3.50 U3.51 U3.52 U3.53 U3.54 U3.55 U3.56 U3.57 U3.58 U3.59 U3.60 U3.61 U3.62 U3.63 U3.64 U4.4 U4.5 U5.4 U5.5
copper on no net: | length 260.7
  Bottom Layer w0.2: 177.011,106.045 177.265,106.299 177.265,172.857 177.382,172.974 240.648,172.974 240.765,172.857 240.765,106.68 240.13,106.045 177.011,106.045

## Keep-outs
Keep-Out Layer:
  lines w1: 91.948,27.051 92.329,27.051 ; 0,7.747 0,100.457 9.017,109.474 9.017,110.998 0.889,119.126 0.889,213.233 7.747,220.091 143.129,220.091 150,213.22 150,119.012 141.986,110.998 141.986,109.982 150,101.968 150,9.03 140.97,0 7.747,0 0,7.747

## Other copper
Top Layer:
  region net GND: 202.792,134.874 202.792,134.493 188.695,134.493 188.568,134.62 188.568,132.334 189.076,131.826 189.076,131.699 209.65,131.699 209.777,131.826 208.126,133.477 208.126,138.684 207.872,138.684 205.713,140.843 202.919,140.843
  region net vdd: 179.297,140.335 180.821,138.811 187.933,138.811 186.663,137.541 186.956,137.248 186.956,130.468 179.043,138.381
  region net GND: 92.893,58.225 92.893,60.862 92.964,60.933 95.123,60.933 95.123,59.282 95.25,59.155 92.964,56.869 92.964,56.615
  region net GND: 181.456,154.432 184.758,157.734 193.394,157.734 197.839,153.289 197.839,144.399 202.792,139.446 193.521,139.446 192.632,140.335 192.632,151.765 189.965,154.432
  region net GND: 239.368,140.589 239.241,140.716 239.241,171.069 237.844,172.466 237.717,172.339 179.805,172.339 178.281,170.815 178.281,165.354 178.916,164.719 186.155,164.719 187.425,165.989 187.425,167.513 188.441,168.529 225.398,168.529 226.16,167.767 226.16,163.195 228.7,160.655 228.7,153.416 230.859,151.257 230.859,146.05 230.986,145.923 233.272,145.923 233.526,145.669 232.891,145.669 238.987,139.573
  region net GND: 239.368,113.157 239.368,108.331 237.971,106.934 179.805,106.934 178.281,108.458 178.535,108.712 178.535,136.017 186.155,128.397 193.013,128.397 193.013,125.222 182.853,115.062 182.853,112.522 184.885,110.49 189.203,110.49 199.871,121.158 199.871,128.524 232.637,128.524 232.637,123.571 233.145,123.063 237.717,123.063 238.606,123.952 239.241,123.952

## Text inside footprints (layer, text, board x,y; h text height)
D1: Top Overlay "+" at 86.106,72.998 h1.52 r90
D2: Top Overlay "+" at 94.361,73.025 h1.52 r90
J2: Mechanical 1 "Mech 2 - Clearance, move to internal plane if present" at 182.851,100.609 h0.3 r90; Mechanical 1 "Mech 1 - Slot cut-out" at 182.351,100.609 h0.3 r90; Mechanical 1 "Assign keep-out area to slot" at 181.351,100.609 h0.3 r90; Mechanical 1 "Alert PCB fab to slot details" at 181.851,100.609 h0.3 r90
T1: Top Overlay "1 2" at 146.558,122.475 h2.5 r90
T2: Top Overlay "1 2" at 146.431,134.112 h2.5 r90
T3: Top Overlay "1 2" at 146.304,145.669 h2.5 r90
T4: Top Overlay "1 2" at 146.304,157.4 h2.5 r90
T5: Top Overlay "1 2" at 146.177,169.211 h2.5 r90
T6: Top Overlay "1 2" at 146.177,180.975 h2.5 r90
T7: Top Overlay "1 2" at 146.177,192.833 h2.5 r90
T8: Top Overlay "1 2" at 146.177,204.644 h2.5 r90
T9: Top Overlay "1 2" at 4.953,210.646 h2.5 r270
T10: Top Overlay "1 2" at 4.826,198.708 h2.5 r270
T11: Top Overlay "1 2" at 4.699,186.817 h2.5 r270
T12: Top Overlay "1 2" at 4.699,175.086 h2.5 r270
T13: Top Overlay "1 2" at 4.699,163.195 h2.5 r270
T14: Top Overlay "1 2" at 4.699,151.384 h2.5 r270
T15: Top Overlay "1 2" at 4.699,139.573 h2.5 r270
T16: Top Overlay "1 2" at 4.699,127.762 h2.5 r270
T17: Top Overlay "1 2" at 3.81,99.06 h2.5 r270
T18: Top Overlay "1 2" at 3.81,87.249 h2.5 r270
T19: Top Overlay "1 2" at 3.81,75.438 h2.5 r270
T20: Top Overlay "1 2" at 3.81,63.627 h2.5 r270
T21: Top Overlay "1 2" at 3.81,51.943 h2.5 r270
T22: Top Overlay "1 2" at 3.81,40.259 h2.5 r270
T23: Top Overlay "1 2" at 3.81,28.448 h2.5 r270
T24: Top Overlay "1 2" at 3.81,16.51 h2.5 r270
U1: Mechanical 13 "CUTOUT POLYGON" at 73.527,44.662 h0.25 r90; Mechanical 13 "ANTENNA AREA" at 73.019,44.662 h0.25 r90